# EAGLE board untitled (EAGLE 9.6.2)
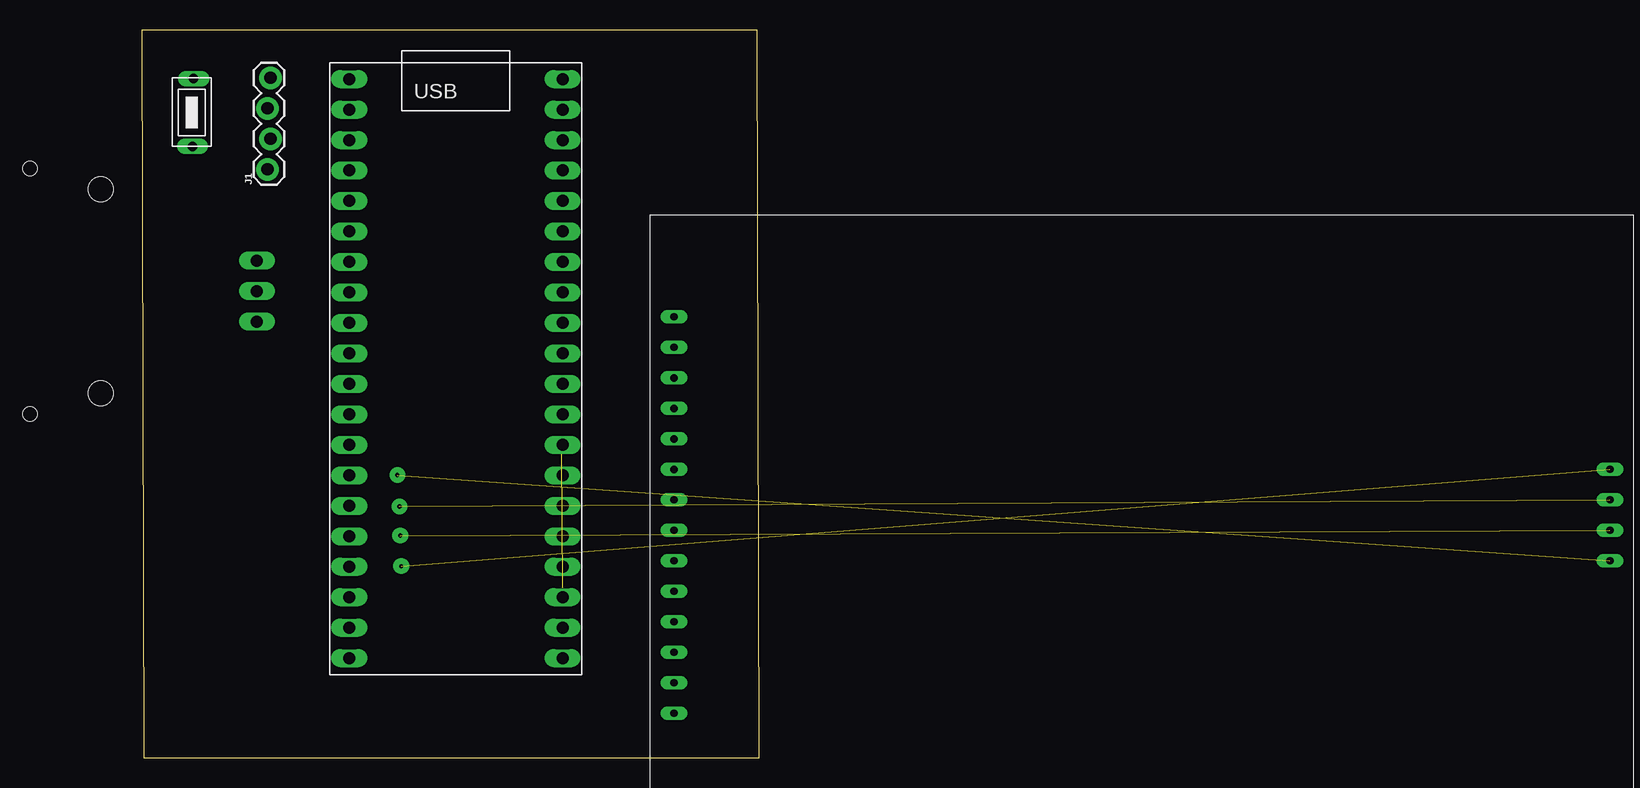
[diagram p0: board, top side]
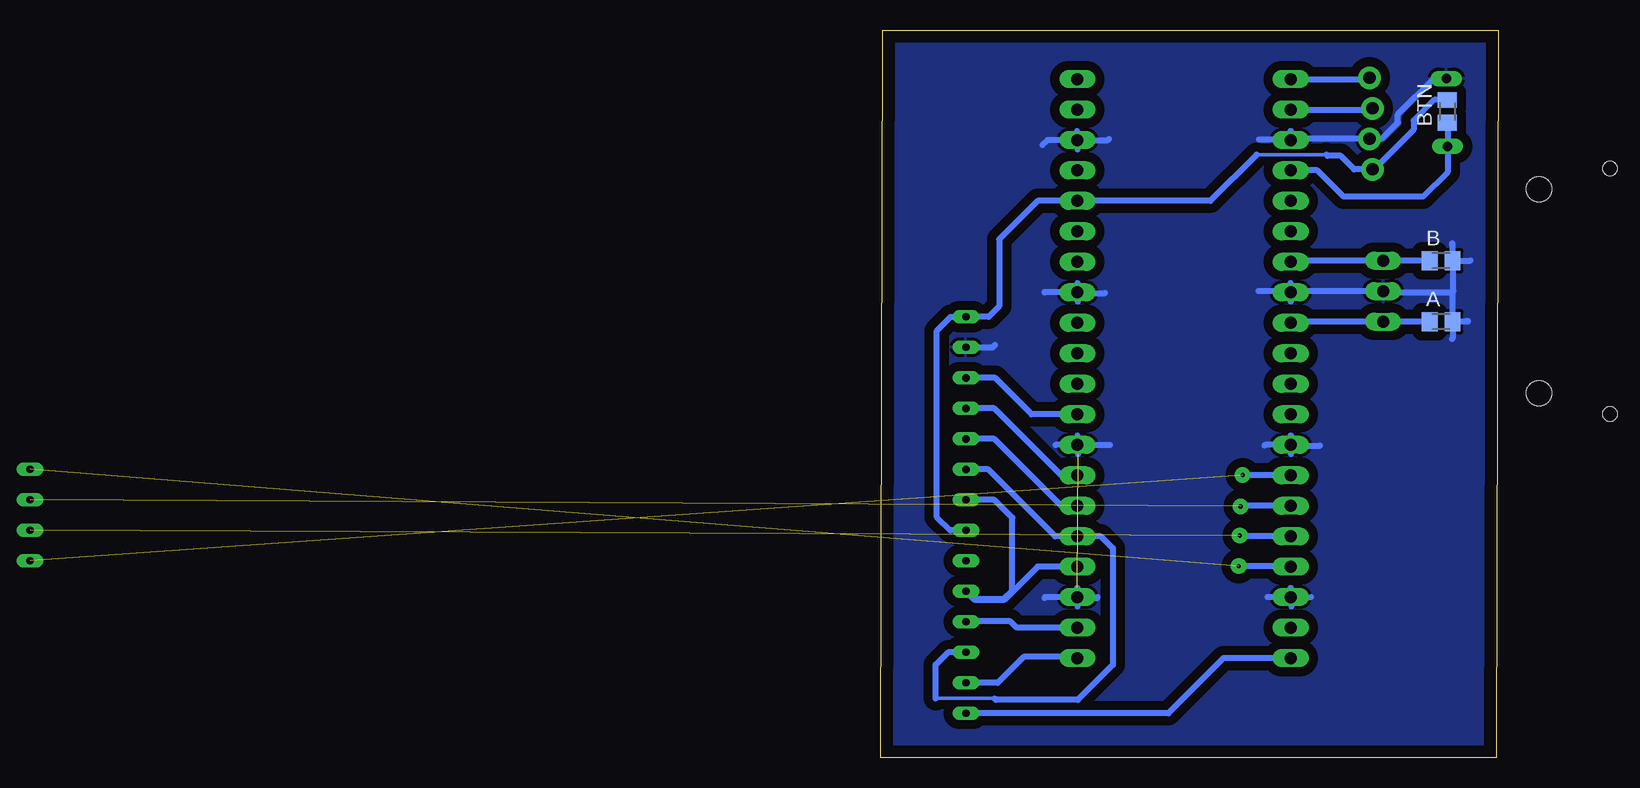
[diagram p1: board, bottom side, seen from below]

Size 51.47 x 60.66 mm. Coordinates in mm from the lower left corner, seen from the top.
Outline: 0.18,0 51.47,0 51.29,60.66 0,60.66 0.18,0
Copper layers (1*16): Top 0.035mm / dielectric 1.5mm / Bottom 0.035mm
Design rules "default *": minimum track width 6mil, minimum drill 0.35mm, track to track 30mil, track to pad 30mil, pad to pad 6mil, via to via 6mil, smd to smd 6mil, copper to edge 40mil, drill to drill 6mil, minimum pad ring 10mil, minimum via ring 8mil, stop-mask expansion 4mil, vias tented up to drill 0mil, thermal gap 10mil

## Footprints (pad centres in the part's own frame; a part is rotated, then mirrored left to right if it is on the bottom)
M0805 = smd 1.3 x 1.6: 1 -0.95,0; 2 0.95,0
1X04_LOCK = drill 1.016 pad 1.88: 1 0,0.127; 2 2.54,-0.127; 3 5.08,0.127; 4 7.62,-0.127
PICO_TH = drill 1 long: 1 -8.55,24.03; 2 -8.55,21.49; 3 -8.55,18.95; 4 -8.55,16.41; 5 -8.55,13.87; 6 -8.55,11.33; 7 -8.55,8.79; 8 -8.55,6.25; 9 -8.55,3.71; 10 -8.55,1.17; 11 -8.55,-1.37; 12 -8.55,-3.91; 13 -8.55,-6.45; 14 -8.55,-8.99; 15 -8.55,-11.53; 16 -8.55,-14.07; 17 -8.55,-16.61; 18 -8.55,-19.15; 19 -8.55,-21.69; 20 -8.55,-24.23; 21 9.23,-24.23; 22 9.23,-21.69; 23 9.23,-19.15; 24 9.23,-16.61; 25 9.23,-14.07; 26 9.23,-11.53; 27 9.23,-8.99; 28 9.23,-6.45; 29 9.23,-3.91; 30 9.23,-1.37; 31 9.23,1.17; 32 9.23,3.71; 33 9.23,6.25; 34 9.23,8.79; 35 9.23,11.33; 36 9.23,13.87; 37 9.23,16.41; 38 9.23,18.95; 39 9.23,21.49; 40 9.23,24.03
EC25-RING-ENCODER = drill 1 pad 1.27 long: A -2.54,0; B 2.54,0; C 0,0 | hole 2.1: -8.5,13; 8.5,13 | hole 1.2: -10.225,18.9; 10.225,18.9
TFT-2.8-SD = drill 0.6 long: CS-DIS 13.58,2; CS-SD 21.19,80; CS-T 33.9,2; DC-DIS 18.66,2; DI-T 36.44,2; DO-T 38.98,2; GND 11.03,2; IRQ-T 41.52,2; LED 26.28,2; MISO-DIS 28.82,2; MISO-SD 26.27,80; MOSI-DIS 21.2,2; MOSI-SD 23.73,80; RES-DIS 16.12,2; SCK-DIS 23.74,2; SCK-SD 28.81,80; SCK-T 31.36,2; VCC 8.49,2
BTN-3X6X4.3 = drill 0.8 pad 1.27 long: P$1 1.27,2.54; P$2 6.92,2.44

## Placement (x,y rotation side)
A  [M0805]  4.78,36.35 0 bottom
B  [M0805]  4.78,41.43 0 bottom
BTN  [M0805]  4.27,53.87 90 bottom
J1  [1X04_LOCK]  10.62,49.05 90 top
U$1  PICO  [PICO_TH]  25.86,32.54 0 top
U$2  RING_ENCODER  [EC25-RING-ENCODER]  9.6,38.89 90 top
U$3  ST7789  [TFT-2.8-SD]  42.37,45.24 270 top
U$4  3X6X4.3-BUTTON  [BTN-3X6X4.3]  6.78,49.68 90 top

## Library data of the parts
A B BTN = rcl; SPICEPREFIX: R
J1 = SparkFun-Connectors; PROD_ID: CONN-09696
U$1 = pipico
U$2 = userlib
U$3 = adafruit
U$4 = buttons

## Nets
3V3: BTN.2 J1.1 U$1.36 U$3.LED U$3.VCC
A: A.1 U$1.9 U$2.A
B: B.1 U$1.7 U$2.B
BTN: BTN.1 U$1.4 U$4.P$1
D-CS: U$1.29 U$3.CS-DIS
D-DC: U$1.26 U$3.DC-DIS
D-RST: U$1.27 U$3.RES-DIS
GND: A.2 B.2 J1.2 U$1.3 U$1.8 U$1.13 U$1.18 U$1.23 U$1.28 U$1.33 U$1.38 U$2.C U$3.GND U$4.P$2
MISO: U$1.21 U$3.DO-T
MOSI: U$1.25 U$3.DI-T U$3.MOSI-DIS
RX: J1.3 U$1.2
SCK: U$1.24 U$3.SCK-DIS U$3.SCK-T
SD-CS: U$1.17 U$3.CS-SD
SD-MISO: U$1.16 U$3.MISO-SD
SD-MOSI: U$1.15 U$3.MOSI-SD
SD-SCK: U$1.14 U$3.SCK-SD
T-CS: U$1.22 U$3.CS-T
T-IRQ: U$1.20 U$3.IRQ-T
TX: J1.4 U$1.1

## Tracks (layer width: path | path; a pad name or v marks a point on that pad's centre or on a via)
3V3
  Bottom 0.305: 14.33,50.27 20.14,50.27
  Bottom 0.508: BTN.2 5.35,54.82 7.06,53.11 7.06,52.35 10.36,49.05 J1.1 12.01,49.05 13.13,50.17 14.22,50.17 14.33,50.27 | U$3.LED 45.68,18.96 46.79,20.07 46.79,35.61 45.65,36.75 U$3.VCC 42.48,36.75 41.61,37.62 41.61,43.21 38.4,46.41 U$1.36 24,46.41 20.14,50.27
A
  Bottom 0.508: A.1 U$2.A 17.21,36.35 U$1.9
B
  Bottom 0.508: B.1 U$2.B 17.21,41.43 U$1.7
BTN
  Bottom 0.508: U$1.4 15.09,48.95 12.9,46.76 6.3,46.76 4.24,48.82 U$4.P$1 4.24,52.9 BTN.1
D-CS
  Bottom 0.508: U$1.29 38.89,28.63 41.92,31.66 U$3.CS-DIS
D-DC
  Bottom 0.508: U$1.26 36.43,21.01 42,26.58 U$3.DC-DIS
D-RST
  Bottom 0.508: U$1.27 36.43,23.55 42,29.12 U$3.RES-DIS
GND  (1 unrouted)
  Bottom 0.508: J1.2 17.21,51.59 U$1.3 | J1.2 9.83,51.59 | 3.89,38.76 3.76,38.89 3.83,38.95 B.2 | 3.89,38.76 9.47,38.76 U$2.C 17.21,38.89 U$1.8 | 3.89,38.76 3.83,38.7 A.2 | U$1.13 19.43,26.09 19.51,26.01 | U$1.13 17.23,26.01 14.86,26.01 | U$1.28 32.39,26.09 | U$1.23 37.77,13.39 37.85,13.31 | U$3.GND 42.15,34.21 41.96,34.39 | U$1.33 37.79,38.79 37.8,38.79 37.82,38.79 37.82,38.81 | U$1.33 35.04,38.74 32.79,38.74 | U$1.8 17.41,38.89 19.99,38.89 | U$1.38 37.59,51.49 38,51.08 | U$1.38 32.54,51.49 32.46,51.56 | 19.96,51.54 17.36,51.54 U$1.3 | B.2 2.34,41.43 | B.2 3.83,42.87 3.84,42.88 3.86,42.88 3.86,42.72 | A.2 3.77,36.4 2.51,36.4 2.51,36.37 2.72,36.37 2.72,36.42 | A.2 3.83,34.96 3.89,34.9 | U$1.23 35.09,14.14 35.1,14.16 | U$1.23 33.4,13.39 33.5,13.28 34.32,13.28 34.32,13.36 33.4,13.36 | U$1.23 35.08,12.62 | U$1.28 35.08,26.86 | U$1.28 36.9,26.09 36.91,26.09 | U$1.28 35.03,26.03 35.03,25.32 | U$1.33 35.09,38.05 35.05,38.02 | U$1.33 35.09,39.55 35.08,39.56 | U$1.8 17.31,39.54 17.32,39.56 | U$1.8 17.31,38.03 17.3,38.02 | U$1.3 17.31,52.25 17.3,52.26 | U$1.38 35.1,51.5 35.1,52.26 | U$1.38 35.09,50.73 35.08,50.72 | U$1.13 17.31,26.85 17.3,26.86 | U$1.13 17.31,25.35 17.27,25.32 | U$1.18 19.25,13.39 | U$1.18 15.62,13.39 | U$1.18 17.31,14.15 17.3,14.16 | U$1.18 17.25,13.33 17.25,12.62 | J1.2 9.73,51.59 8.38,52.93 8.38,53.62 5.4,56.6 U$4.P$2
  pour Bottom: 0.18,0 0,60.66 51.29,60.66 51.47,0
MISO
  Bottom 0.508: U$1.21 35.19,8.41 39.57,8.41 41.72,6.26 U$3.DO-T
MOSI
  Bottom 0.305: 41.99,4.95 46.89,4.95
  Bottom 0.508: U$3.MOSI-DIS 42.5,24.04 36.93,18.47 U$1.25 33.12,18.47 32.13,17.48 32.13,7.75 35.05,4.83 41.86,4.83 41.99,4.95 | U$3.DI-T 45.86,8.8 46.89,7.77 46.89,4.95
RX
  Bottom 0.508: U$1.2 16.55,54.03 10.59,54.03 J1.3
SCK
  Bottom 0.508: U$1.24 38.4,15.93 41.14,13.19 43.68,13.19 U$3.SCK-T 43.73,13.24 41.22,13.24 40.51,13.94 40.51,20.02 42,21.5 U$3.SCK-DIS
SD-CS  (via drill 0.35 pad 1.3)  (1 unrouted)
  Bottom 0.508: U$1.17 17.36,15.98 v21.64,15.98
SD-MISO  (via drill 0.35 pad 1.3)  (1 unrouted)
  Bottom 0.508: U$1.16 21.41,18.47 21.51,18.57 v21.55,18.53
SD-MOSI  (via drill 0.35 pad 1.3)  (1 unrouted)
  Bottom 0.508: U$1.15 21.39,21.01 21.46,20.93 v21.49,20.96
SD-SCK  (via drill 0.35 pad 1.3)  (1 unrouted)
  Bottom 0.508: U$1.14 21.06,23.55 21.13,23.62 21.26,23.62 v21.31,23.57
T-CS
  Bottom 0.508: U$1.22 40.13,10.85 40.67,11.38 44.33,11.38 U$3.CS-T
T-IRQ
  Bottom 0.508: U$1.20 22.91,8.31 27.5,3.72 U$3.IRQ-T
TX
  Bottom 0.508: U$1.1 16.55,56.57 10.84,56.57 J1.4